# Altium PCB PCB2.PcbDoc
Units mil, origin at the board's own origin, x right, y up, seen from the top; angles counter-clockwise.
Board outline 2598.43 x 2874.02 mil, 2 copper layers (Top Layer, Bottom Layer); 202 components, 116 nets, 598 pads, 104 vias.
Unrouted connection lines stored in the file: 22.
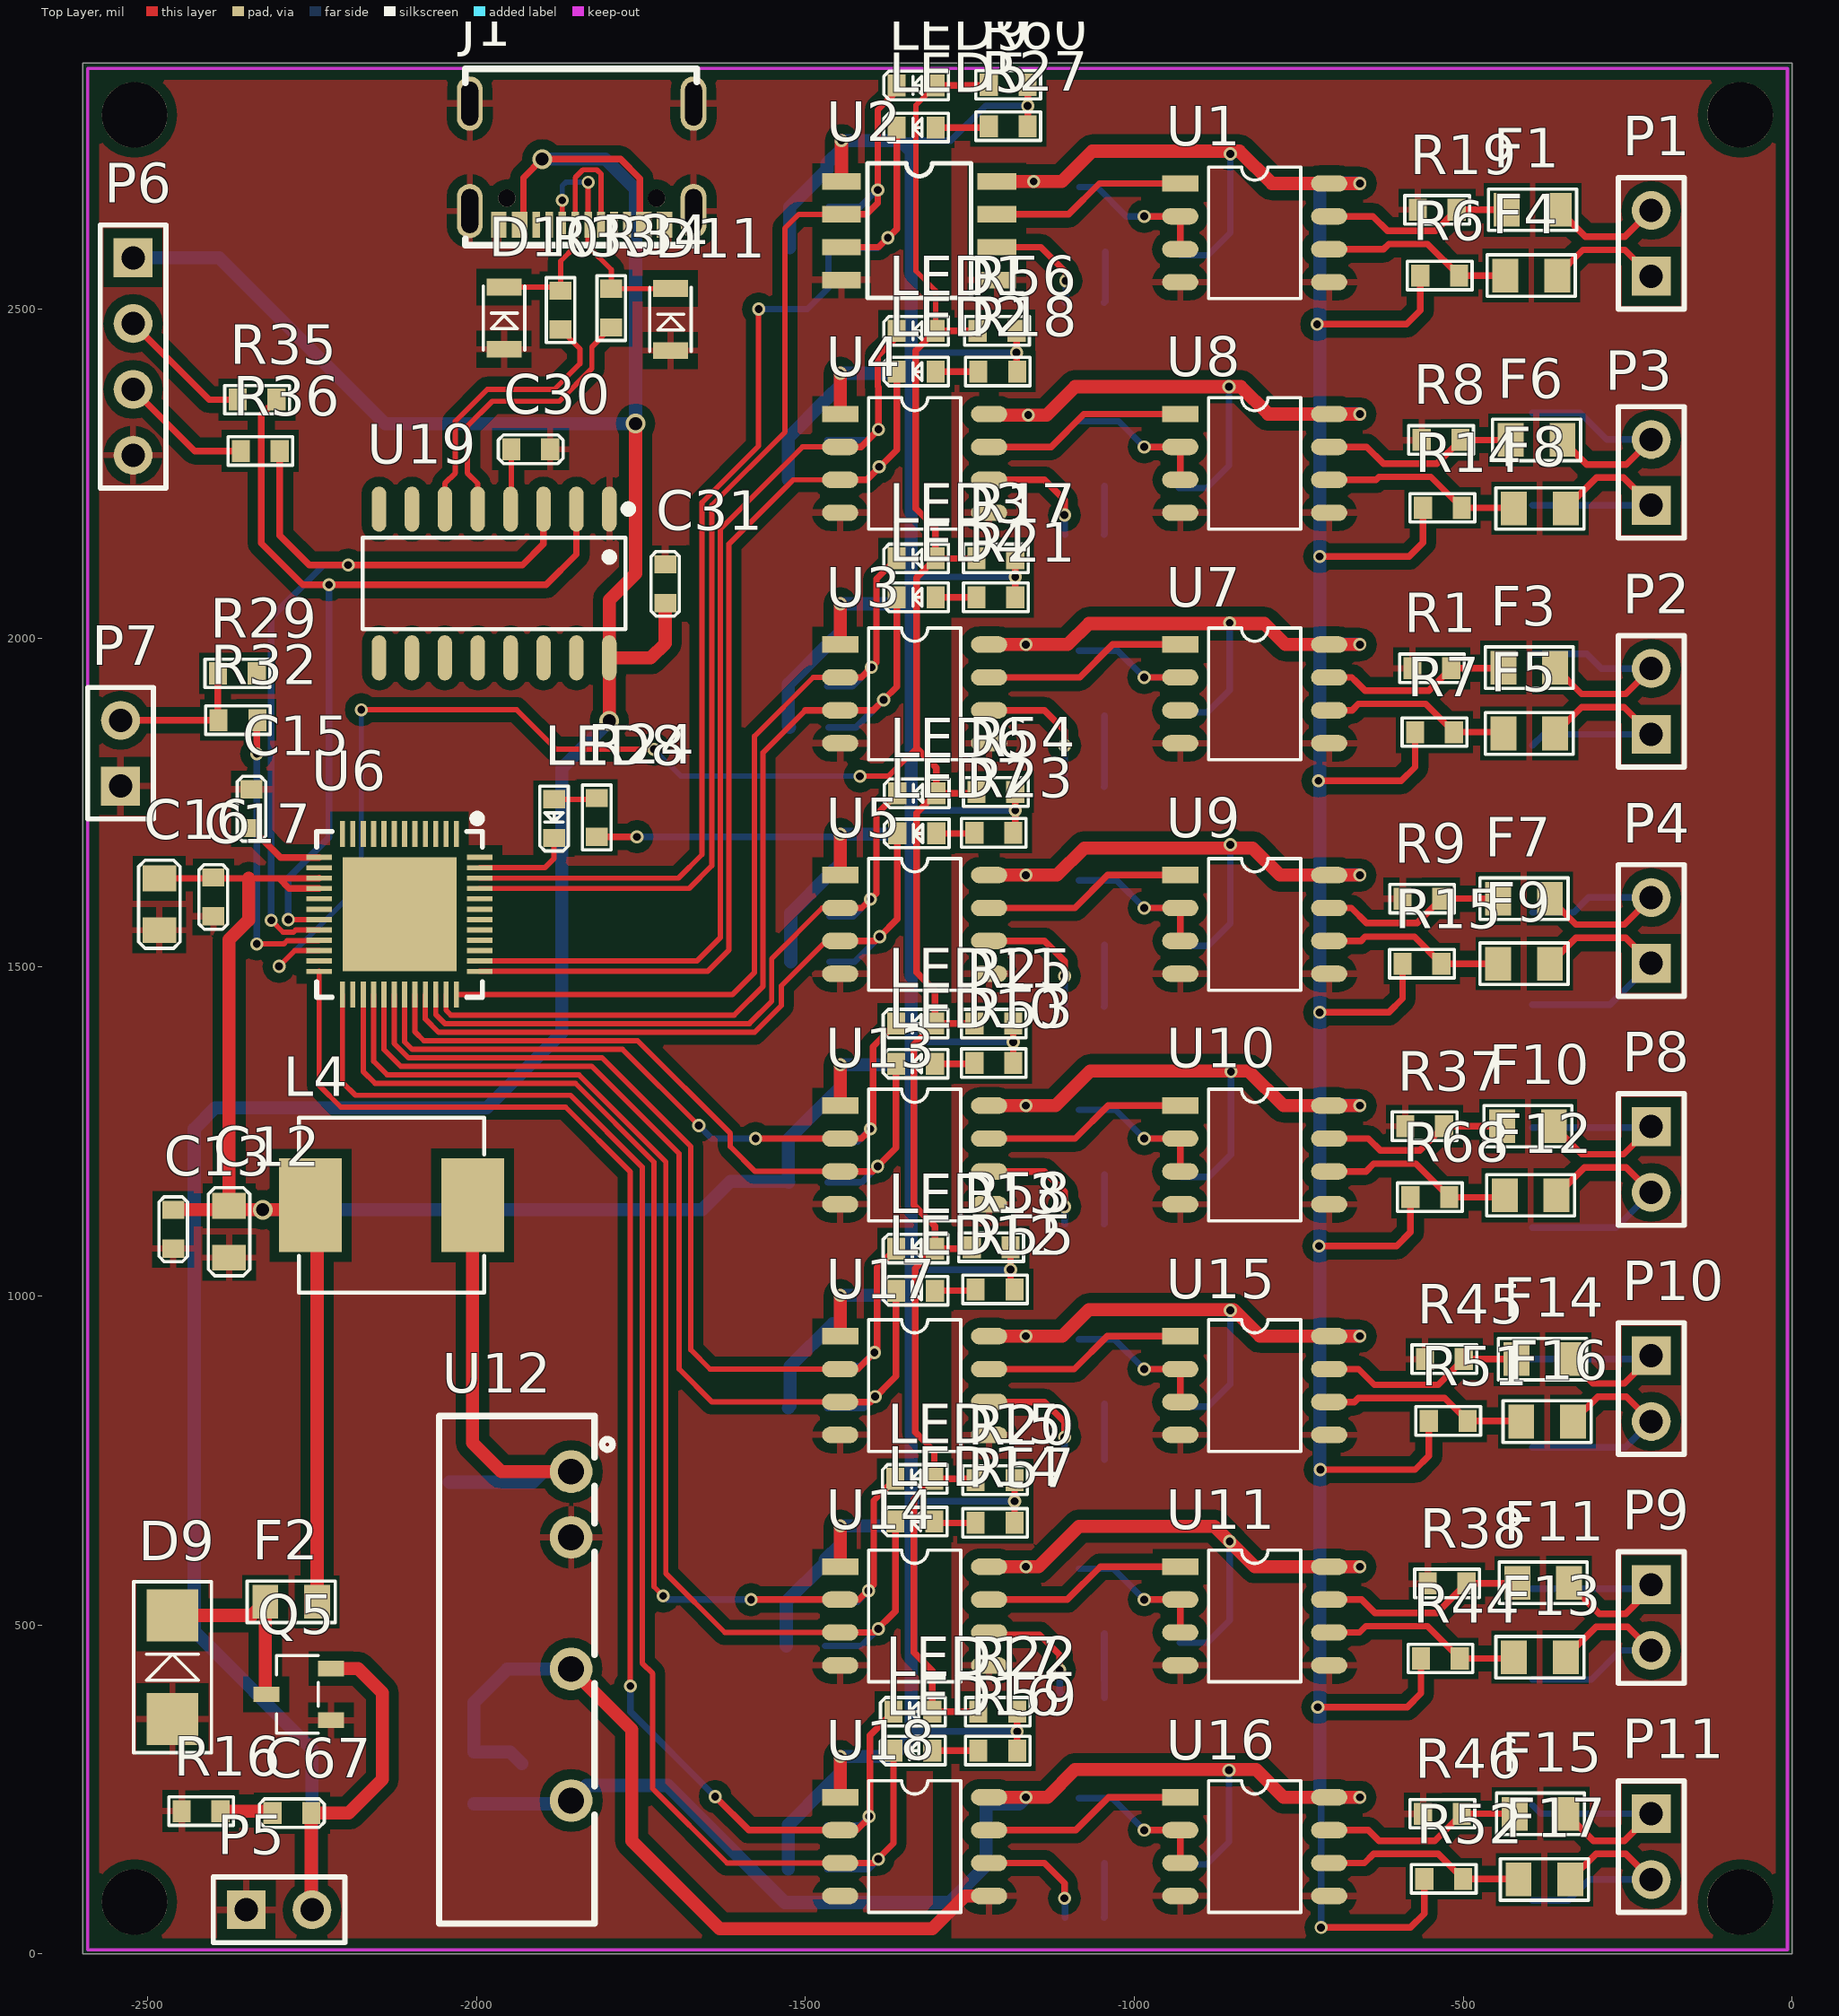
[diagram p0: Top Layer view]
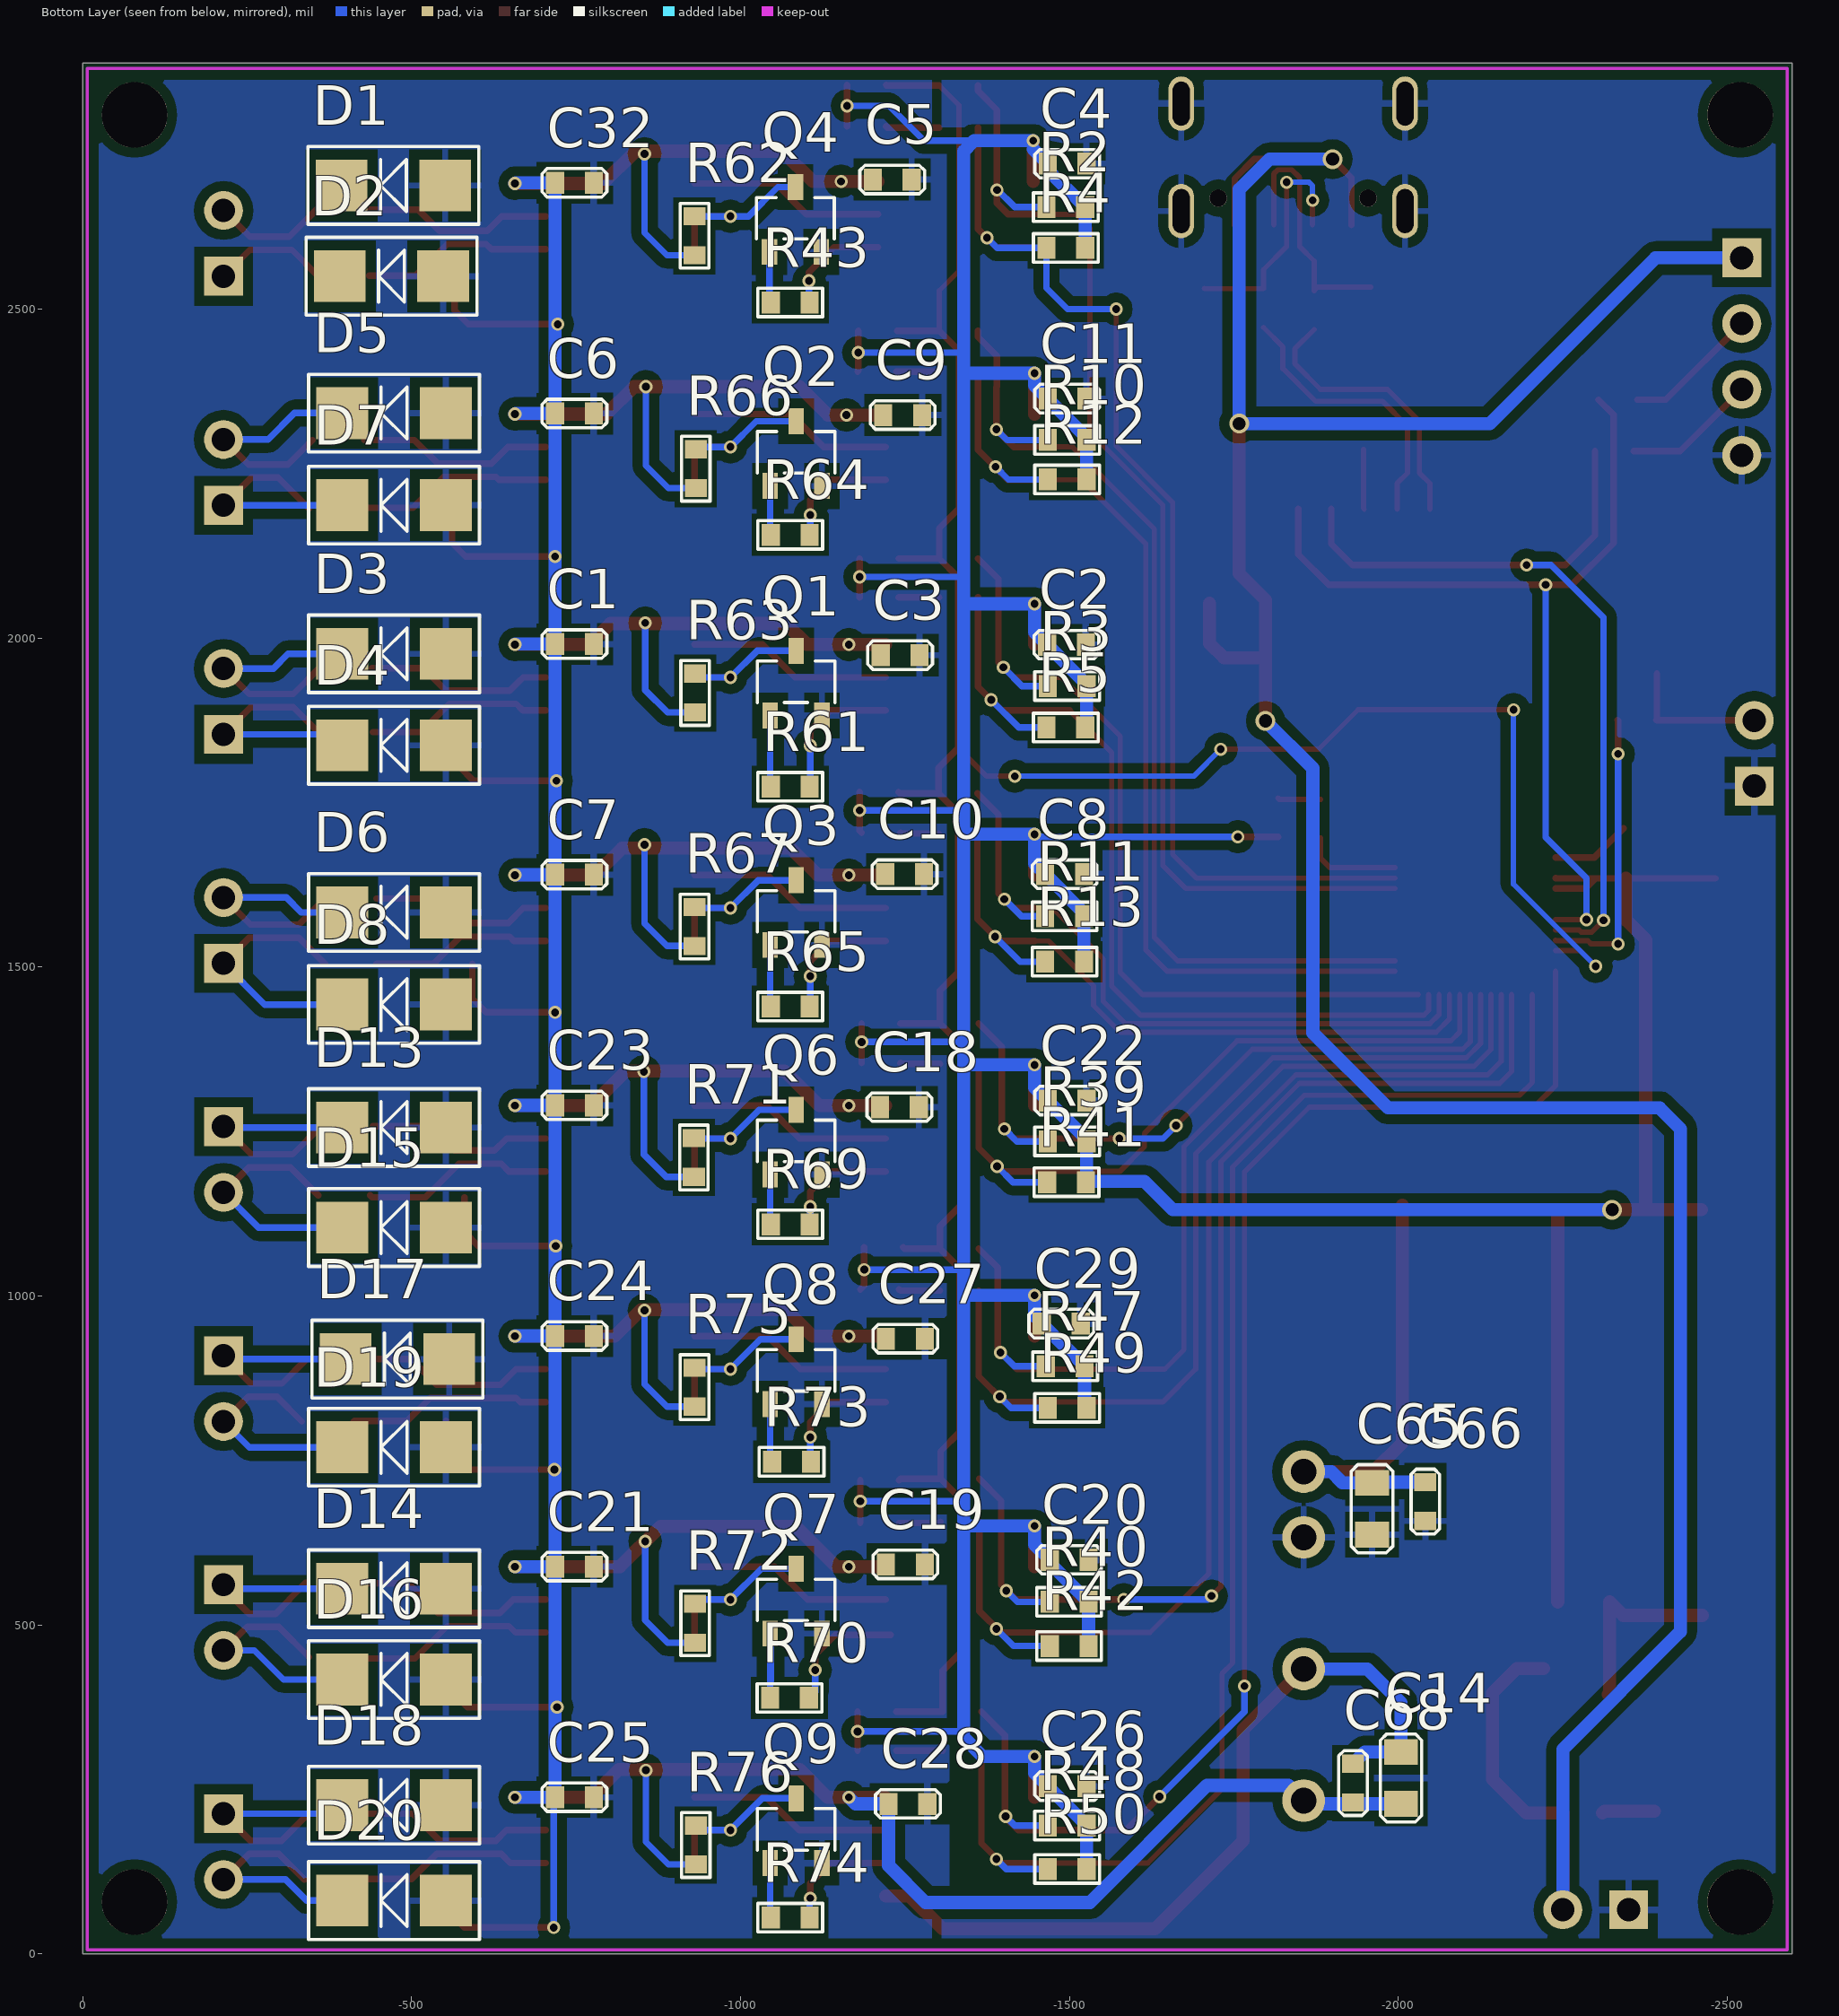
[diagram p1: Bottom Layer view, seen from below]

## Layer stack, top to bottom
Top Layer: signal copper 1.4
Dielectric: dielectric 12.6, FR-4, Dk 4.8
Bottom Layer: signal copper 1.4

## Board outline
-2598.43,0 0,0 0,2874.02 -2598.43,2874.02

## Design rules (kind name [scope] priority, off if disabled: settings)
Clearance Clearance_1 [InPolygon] p1: gap=15
Clearance [All] p2: gap=5
DiffPairsRouting [All] p1: maxlimit=10 minlimit=10 mostfreqgap=10 maxuncoupledlength=500
PolygonConnect [All] p1: connectstyle=Relief reliefconductorwidth=10 reliefentries=4 polygonreliefangle="90 Angle"
RoutingVias [All] p1: holewidth=28 width=50 viastyle="Through Hole" minholewidth=28 minwidth=50 maxholewidth=28 maxwidth=50
SilkscreenOverComponentPads [All] p1: minsilkscreentomaskgap=10
SolderMaskExpansion [All] p1: expansion=4
Width [All] p1: maxlimit=200 minlimit=5 preferedwidth=10
26 further rules are at their usual default settings.

## Classes and differential pairs
component class rs485: C1 C2 C3 C4 C5 C6 C7 C8 C9 C10 C11 C12 C13 C14 C18 C19 C20 C21 C22 C23 C24 C25 C26 C27 C28 C29 C30 C31 C32 C65 C66 C67 C68 C70 D1 D2 D3 D4 D5 D6 D7 D8 D9 D13 D14 D15 D16 D17 D18 D19 D20 F1 F2 F3 F4 F5 F6 F7 F8 F9 F10 F11 F12 F13 F14 F15 F16 F17 L4 P1 P2 P3 P4 P5 P8 P9 P10 P11 Q1 Q2 Q3 Q4 Q5 Q6 Q7 Q8 Q9 R1 R2 R3 R4 R5 R6 R7 R8 R9 R10 R11 R12 R13 R14 R15 R16 R19 R37 R38 R39 R40 R41 R42 R43 R44 R45 R46 R47 R48 R49 R50 R51 R52 R61 R62 R63 R64 R65 R66 R67 R68 R69 R70 R71 R72 R73 R74 R75 R76 U1 U2 U3 U4 U5 U7 U8 U9 U10 U11 U12 U13 U14 U15 U16 U17 U18 U19
component class Sheet2: C15 C16 C17 D10 D11 J1 LED1 LED2 LED3 LED4 LED5 LED6 LED7 LED8 LED9 LED10 LED11 LED12 LED13 LED14 LED15 LED16 LED17 P6 P7 R17 R18 R20 R21 R22 R23 R24 R25 R27 R29 R32 R33 R34 R35 R36 R53 R54 R55 R56 R57 R58 R59 R60 U6
differential pair 4858: +4858_P -4858_N
differential pair 4857: +4857_P -4857_N
differential pair 4856: +4856_P -4856_N
differential pair 4855: +4855_P -4855_N
differential pair 4854: +4854_P -4854_N
differential pair 4853: +4853_P -4853_N
differential pair 4852: +4852_P -4852_N
differential pair 4851: +4851_P -4851_N
differential pair USB: +USB_P -USB_N

## Components (designator, comment, footprint, x,y, rotation, side; value= is the part's Value field where it differs from the comment)
C1 "0.1uF/50V/X5R" 0603C -777,1990.86 r0 bottom
C2 "0.1uF/50V/X5R" 0603C -1525,1990 r0 bottom
C3 "0.1uF/50V/X5R" 0603C -1272,1974 r0 bottom
C4 "0.1uF/50V/X5R" 0603C -1526,2721 r0 bottom
C5 "0.1uF/50V/X5R" 0603C -1260,2697 r0 bottom
C6 "0.1uF/50V/X5R" 0603C -777,2341.43 r0 bottom
C7 "0.1uF/50V/X5R" 0603C -777,1640.29 r0 bottom
C8 "0.1uF/50V/X5R" 0603C -1522.06,1641 r0 bottom
C9 "0.1uF/50V/X5R" 0603C -1276,2339 r0 bottom
C10 "0.1uF/50V/X5R" 0603C -1279,1641 r0 bottom
C11 "0.1uF/50V/X5R" 0603C -1526,2364 r0 bottom
C12 "10uF/25V" 0805C -2376,1137 r270 top
C13 "0.1uF" 0603C -2461,1131 r270 top
C14 "10uF/25V" 0805C -2004,228 r90 bottom
C15 "0.1uF" 0603C -2342,1770 r270 top
C16 "22uF/16V/X5R" 0805C -2482,1556 r90 top
C17 "0.1uF/50V/X5R" 0603C -2400,1577 r90 top
C18 "0.1uF/50V/X5R" 0603C -1271,1287 r0 bottom
C19 "0.1uF/50V/X5R" 0603C -1280,592 r0 bottom
C20 "0.1uF/50V/X5R" 0603C -1529,599 r0 bottom
C21 "0.1uF/50V/X5R" 0603C -777,588.57 r0 bottom
C22 "0.1uF/50V/X5R" 0603C -1526,1297 r0 bottom
C23 "0.1uF/50V/X5R" 0603C -777,1289.71 r0 bottom
C24 "0.1uF/50V/X5R" 0603C -777,939.14 r0 bottom
C25 "0.1uF/50V/X5R" 0603C -777,238 r0 bottom
C26 "0.1uF/50V/X5R" 0603C -1526,255 r0 bottom
C27 "0.1uF/50V/X5R" 0603C -1280,935 r0 bottom
C28 "0.1uF/50V/X5R" 0603C -1284,228 r0 bottom
C29 "0.1uF/50V/X5R" 0603C -1517,958 r0 bottom
C30 "0.1uF/50V/X5R" 0603C -1947,2287 r0 top
C31 "0.1uF/50V/X5R" 0603C -1713,2112 r270 top
C32 "0.1uF/50V/X5R" 0603C -777,2692 r0 bottom
C65 "3.3uF" 0805C -1960,716 r270 bottom
C66 "0.1uF" 0603C -2041,717 r270 bottom
C67 "10uF" 0603C -2251,214 r180 top
C68 "0.1uF" 0603C -1931,230 r90 bottom
D1 "SMAJ6.5CA" SMA -551,2688 r0 bottom
D2 "SMAJ6.5CA" SMA -548,2550 r0 bottom
D3 "SMAJ6.5CA" SMA -552,1976 r0 bottom
D4 "SMAJ6.5CA" SMA -552,1837 r0 bottom
D5 "SMAJ6.5CA" SMA -552,2342 r0 bottom
D6 "SMAJ6.5CA" SMA -552,1583 r0 bottom
D7 "SMAJ6.5CA" SMA -552,2202 r0 bottom
D8 "SMAJ6.5CA" SMA -552,1443 r0 bottom
D9 "SMAJ5.0CA" SMA -2462,357 r90 top
D10 "CESDB5V0D3" SOD323 -1958,2439 r90 top
D11 "CESDB5V0D3" SOD323 -1705,2437 r90 top
D13 "SMAJ6.5CA" SMA -552,1256 r0 bottom
D14 "SMAJ6.5CA" SMA -552,555 r0 bottom
D15 "SMAJ6.5CA" SMA -552,1104 r0 bottom
D16 "SMAJ6.5CA" SMA -552,417 r0 bottom
D17 "SMAJ6.5CA" SMA -557,904 r0 bottom
D18 "SMAJ6.5CA" SMA -552,226 r0 bottom
D19 "SMAJ6.5CA" SMA -552,770 r0 bottom
D20 "SMAJ6.5CA" SMA -552,81 r0 bottom
F1 "100mA" 0805R -355,2651 r180 top
F2 "SMD0805P050" 0805R -2321,535 r0 top
F3 "100mA" 0805R -360,1955 r180 top
F4 "100mA" 0805R -357,2551 r180 top
F5 "100mA" 0805R -360,1855 r180 top
F6 "100mA" 0805R -349,2301 r180 top
F7 "100mA" 0805R -368,1604 r180 top
F8 "100mA" 0805R -344,2197 r180 top
F9 "100mA" 0805R -368,1505 r180 top
F10 "100mA" 0805R -362,1258 r180 top
F11 "100mA" 0805R -339,564 r180 top
F12 "100mA" 0805R -358,1153 r180 top
F13 "100mA" 0805R -344,451 r180 top
F14 "100mA" 0805R -340,904 r180 top
F15 "100mA" 0805R -343,213 r180 top
F16 "100mA" 0805R -333,809 r180 top
F17 "100mA" 0805R -337,113 r180 top
J1 "TYPE C_16P" TYPEC_16P -1840,2797 r180 top
L4 "47uH" IND-SMD_L7.0-W6.6_FXL0630 -2129,1138 r180 top
LED1 "LED" 0603LED -1302,2467 r180 top
LED2 "LED" 0603LED -1302,2405 r180 top
LED3 "LED" 0603LED -1302,2121 r180 top
LED4 "LED" 0603LED -1302,2062 r180 top
LED5 "LED" 0603LED -1302,2776 r180 top
LED6 "LED" 0603LED -1301,1764 r180 top
LED7 "LED" 0603LED -1301,1703 r180 top
LED8 "LED" 0603LED -1882,1755 r270 top
LED9 "LED" 0603LED -1302,2840 r180 top
LED10 "LED" 0603LED -1303,1353 r180 top
LED11 "LED" 0603LED -1303,1414 r180 top
LED12 "LED" 0603LED -1303,1008 r180 top
LED13 "LED" 0603LED -1303,1072 r180 top
LED14 "LED" 0603LED -1304,657 r180 top
LED15 "LED" 0603LED -1304,722 r180 top
LED16 "LED" 0603LED -1307,309 r180 top
LED17 "LED" 0603LED -1307,368 r180 top
P1 "Header 2" HDR1X2 -214,2550 r90 top
P2 "Header 2" HDR1X2 -214,1853.71 r90 top
P3 "Header 2" HDR1X2 -214,2201.86 r90 top
P4 "Header 2" HDR1X2 -214,1505.57 r90 top
P5 "Header 2" HDR1X2 -2350,67 r0 top
P6 "Header 4" HDR1X4 -2522,2578 r270 top
P7 "Header 2" HDR1X2 -2541,1775 r90 top
P8 "Header 2" HDR1X2 -214,1257.43 r270 top
P9 "Header 2" HDR1X2 -214,561.14 r270 top
P10 "Header 2" HDR1X2 -214,909.29 r270 top
P11 "Header 2" HDR1X2 -214,213 r270 top
Q1 "S8050" sot23-3 -1045,1882.29 r270 bottom
Q2 "S8050" sot23-3 -1045,2231.14 r270 bottom
Q3 "S8050" sot23-3 -1045,1533.43 r270 bottom
Q4 "S8050" sot23-3 -1044,2587 r270 bottom
Q5 "SI2301" sot23-3 -2221,355 r0 top
Q6 "S8050" sot23-3 -1045,1184.57 r270 bottom
Q7 "S8050" sot23-3 -1045,486.86 r270 bottom
Q8 "S8050" sot23-3 -1045,835.71 r270 bottom
Q9 "S8050" sot23-3 -1045,138 r270 bottom
R1 "10k" 0603r -577,1954 r0 top
R2 "10k" 0603r -1524,2655 r0 bottom
R3 "10k" 0603r -1526,1927 r0 bottom
R4 "10k" 0603r -1524,2593 r0 bottom
R5 "10k" 0603r -1524,1864 r0 bottom
R6 "10k" 0603r -506,2551 r180 top
R7 "10k" 0603r -514,1857 r180 top
R8 "10k" 0603r -563,2301 r0 top
R9 "10k" 0603r -592,1604 r0 top
R10 "10k" 0603r -1526,2301 r0 bottom
R11 "10k" 0603r -1522.06,1577 r0 bottom
R12 "10k" 0603r -1526,2241 r0 bottom
R13 "10k" 0603r -1522.06,1508 r0 bottom
R14 "10k" 0603r -502,2198 r180 top
R15 "10k" 0603r -533,1505 r180 top
R16 "10k" 0603r -2389,217 r180 top
R17 "2K" 0603R -1240,2121 r0 top
R18 "2K" 0603R -1237,2405 r0 top
R19 "10k" 0603r -569,2651 r0 top
R20 "2K" 0603R -1241,720 r0 top
R21 "2K" 0603R -1240,2062 r0 top
R22 "2K" 0603R -1237,368 r0 top
R23 "2K" 0603R -1243,1704 r0 top
R24 "2K" 0603R -1817,1757 r270 top
R25 "2K" 0603R -1243,1414 r0 top
R27 "2K" 0603R -1221,2778 r0 top
R29 "10k" 0603r -2334,1946.35 r180 top
R32 "10k" 0603r -2392,1875.35 r0 top
R33 "10k" 0603r -1872,2469 r90 top
R34 "10k" 0603r -1795,2472 r90 top
R35 "10k" 0603r -2304,2362.35 r180 top
R36 "10k" 0603r -2299,2284.35 r180 top
R37 "10k" 0603r -588,1258 r0 top
R38 "10k" 0603r -554,563 r0 top
R39 "10k" 0603r -1526,1235 r0 bottom
R40 "10k" 0603r -1529,535 r0 bottom
R41 "10k" 0603r -1525,1173 r0 bottom
R42 "10k" 0603r -1529,468 r0 bottom
R43 "10k" 0603r -1105,2510 r0 bottom
R44 "10k" 0603r -505,449 r180 top
R45 "10k" 0603r -558,904 r0 top
R46 "10k" 0603r -561,213 r0 top
R47 "10k" 0603r -1523,893 r0 bottom
R48 "10k" 0603r -1526,195 r0 bottom
R49 "10k" 0603r -1526,830 r0 bottom
R50 "10k" 0603r -1526,129 r0 bottom
R51 "10k" 0603r -493,810 r180 top
R52 "10k" 0603r -500,114 r180 top
R53 "2K" 0603R -1243,1354 r0 top
R54 "2K" 0603R -1240,1766 r0 top
R55 "2K" 0603R -1241,1010 r0 top
R56 "2K" 0603R -1238,2467 r0 top
R57 "2K" 0603R -1241,655 r0 top
R58 "2K" 0603R -1247,1074 r0 top
R59 "2K" 0603R -1237,309 r0 top
R60 "2K" 0603R -1221,2841 r0 top
R61 "10k" 0603r -1105,1774 r0 bottom
R62 "10k" 0603r -930,2641 r270 bottom
R63 "10k" 0603r -931,1946 r270 bottom
R64 "10k" 0603r -1105,2157 r0 bottom
R65 "10k" 0603r -1105,1440 r0 bottom
R66 "10k" 0603r -932,2287 r270 bottom
R67 "10k" 0603r -930,1591 r270 bottom
R68 "10k" 0603r -521,1150 r180 top
R69 "10k" 0603r -1105,1109 r0 bottom
R70 "10k" 0603r -1104,389 r0 bottom
R71 "10k" 0603r -929,1240 r270 bottom
R72 "10k" 0603r -931,532 r270 bottom
R73 "10k" 0603r -1107,748 r0 bottom
R74 "10k" 0603r -1105,55 r0 bottom
R75 "10k" 0603r -930,891 r270 bottom
R76 "10k" 0603r -932,195 r270 bottom
U1 "SP485R" so-8 -930,2691 r0 top
U2 "ADUM1201ARZ-RL7" SO8 -1445.7,2693.73 r0 top
U3 "ADUM1201ARZ-RL7" SO-8 -1447,1990.14 r0 top
U4 "ADUM1201ARZ-RL7" SO-8 -1447,2340.57 r0 top
U5 "ADUM1201ARZ-RL7" SO-8 -1447,1639.71 r0 top
U6 "STC8H8K64U-45I-QFN48" QFN-48_L6.0-W6.0-P0.40-TL-EP4.4 -2117,1580 r270 top
U7 "SP485R" so-8 -930,1990.14 r0 top
U8 "SP485R" so-8 -930,2340.57 r0 top
U9 "SP485R" so-8 -930,1639.71 r0 top
U10 "SP485R" so-8 -930,1289.29 r0 top
U11 "SP485R" so-8 -930,588.43 r0 top
U12 "B0505LS-1W" PWRM-TH_4P-L19.7-W6.0-P2.54 -1856,483 r270 top
U13 "ADUM1201ARZ-RL7" SO-8 -1447,1289.29 r0 top
U14 "ADUM1201ARZ-RL7" SO-8 -1447,588.43 r0 top
U15 "SP485R" so-8 -930,938.86 r0 top
U16 "SP485R" so-8 -930,238 r0 top
U17 "ADUM1201ARZ-RL7" SO-8 -1447,938.86 r0 top
U18 "ADUM1201ARZ-RL7" SO-8 -1447,238 r0 top
U19 "CH340C" SOP-16_L10.0-W3.9-P1.27-LS6.0-BL -1973,2083 r180 top

## Footprints (in the part's own frame and the unit in brackets; to place one, negate y for a bottom-side part, rotate by r counter-clockwise, add the part's x,y. Pads: shape width x height; smd on the part's side, far side on the other; paste and mask are expansions set on the pad)
0603C [mm]
  rect 0.7x0.85 smd: 1(0,0) 2(1.5,0)
  silkscreen extent -0.5,-0.55 2,0.55
0603LED [mm]
  rect 0.7x0.85 smd: 1(0,0) 2(1.5,0)
  silkscreen extent -0.5,-0.55 2,0.55
0603r [mm]
  rect 0.7x0.85 smd: 1(0,0) 2(1.5,0)
  silkscreen extent -0.5,-0.55 2,0.55
0603R [mm]
  rect 0.7x0.85 smd: 1(0,0) 2(1.5,0)
  silkscreen extent -0.5,-0.55 2,0.55
0805C [mm]
  rect 1x1.3 smd: 1(0,0) 2(2,0)
  silkscreen extent -0.7,-0.8 2.7,0.8
0805R [mm]
  rect 1x1.3 smd: 1(0,0) 2(2,0)
  silkscreen extent -0.7,-0.8 2.7,0.8
HDR1X2 [mm] "Connector; Header; 2 Position"
  rect 1.5x1.5 hole 0.9: 1(0,0)
  round 1.5 hole 0.9: 2(2.54,0)
  silkscreen extent -1.27,-1.27 3.81,1.27
HDR1X4 [mm] "Connector; Header; 4 Position"
  rect 1.5x1.5 hole 0.9: 1(0,0)
  round 1.5 hole 0.9: 2(2.54,0) 3(5.08,0) 4(7.62,0)
  silkscreen extent -1.27,-1.27 8.89,1.27
IND-SMD_L7.0-W6.6_FXL0630 [mm]
  rect 2.424x3.62 smd: 1(3.128,0) 2(-3.128,0)
  silkscreen extent -3.58,-3.38 3.58,3.38
PWRM-TH_4P-L19.7-W6.0-P2.54 [mm]
  round 1.65 hole 1 paste+0 mask+0.05: 1(-6.35,0) 2(-3.81,0) 4(1.27,0) 6(6.35,0)
  silkscreen extent -8.5,-5.1 11.1,1.6
QFN-48_L6.0-W6.0-P0.40-TL-EP4.4 [mm]
  rect 1x0.2 smd paste-100 mask+0.05: 1(-3.1,2.2) 2(-3.1,1.8) 3(-3.1,1.4) 4(-3.1,1) 5(-3.1,0.6) 6(-3.1,0.2) 7(-3.1,-0.2) 8(-3.1,-0.6) 9(-3.1,-1) 10(-3.1,-1.4) 11(-3.1,-1.8) 12(-3.1,-2.2) 25(3.1,-2.2) 26(3.1,-1.8) 27(3.1,-1.4) 28(3.1,-1) 29(3.1,-0.6) 30(3.1,-0.2) 31(3.1,0.2) 32(3.1,0.6) 33(3.1,1) 34(3.1,1.4) 35(3.1,1.8) 36(3.1,2.2)
  rect 0.2x1 smd paste-100 mask+0.05: 13(-2.2,-3.1) 14(-1.8,-3.1) 15(-1.4,-3.1) 16(-1,-3.1) 17(-0.6,-3.1) 18(-0.2,-3.1) 19(0.2,-3.1) 20(0.6,-3.1) 21(1,-3.1) 22(1.4,-3.1) 23(1.8,-3.1) 24(2.2,-3.1) 37(2.2,3.1) 38(1.8,3.1) 39(1.4,3.1) 40(1,3.1) 41(0.6,3.1) 42(0.2,3.1) 43(-0.2,3.1) 44(-0.6,3.1) 45(-1,3.1) 46(-1.4,3.1) 47(-1.8,3.1) 48(-2.2,3.1)
  rect 4.4x4.4 smd paste-100 mask+0.05: 49(0.001,0.001)
  silkscreen extent -3.85,-3.2 3.2,3.2
SMA [mm]
  rect 2x2 smd: 1(0,0) 2(4,0)
  silkscreen extent -1.3,-1.5 5.3,1.5
SO8 [mm]
  rect 1.5x0.635 smd: 1(0.018,0.011) 2(0.018,-1.259) 3(0.018,-2.529) 4(0.018,-3.799) 5(6.018,-3.799) 6(6.018,-2.529) 7(6.018,-1.259) 8(6.018,0.011)
  silkscreen extent 1.02,-4.49 5.02,0.71
so-8 [mil]
  rect 55x25 smd: 1(0,0)
  oval 55x25 smd: 2(0,-50) 3(0,-100) 4(0,-150) 5(226.38,-150) 6(226.38,-100) 7(226.38,-50) 8(226.38,0)
  silkscreen extent 43,-175 183,25
SO-8 [mil]
  rect 55x25 smd: 1(0,0)
  oval 55x25 smd: 2(0,-50) 3(0,-100) 4(0,-150) 5(226.38,-150) 6(226.38,-100) 7(226.38,-50) 8(226.38,0)
  silkscreen extent 43,-175 183,25
SOD323 [mm]
  rect 0.65x1.35 smd: 1(0,0) 2(2.4,0)
  silkscreen extent -0.03,-0.8 2.44,0.8
SOP-16_L10.0-W3.9-P1.27-LS6.0-BL [mm]
  oval 0.56x1.745 smd: 1(-4.445,-2.872) 2(-3.175,-2.872) 3(-1.905,-2.872) 4(-0.635,-2.872) 5(0.635,-2.872) 6(1.905,-2.872) 7(3.175,-2.872) 8(4.445,-2.872) 9(4.445,2.872) 10(3.175,2.872) 11(1.905,2.872) 12(0.635,2.872) 13(-0.635,2.872) 14(-1.905,2.872) 15(-3.175,2.872) 16(-4.445,2.872)
  silkscreen extent -5.33,-3.02 5.08,1.77
sot23-3 [mm]
  rect 1x0.6 smd: 1(0,0) 2(0,2) 3(-2.5,1)
  silkscreen extent -2.1,-0.5 -0.5,2.5
TYPEC_16P [mm]
  oval 1x2.1 hole 0.65 slot 1.7 at 90 deg: 1(-4.32,3.759) 1(-4.32,-0.391) 1(4.32,3.759) 1(4.32,-0.391)
  round 0.67 hole 0.67: 2(-2.89,3.259) 2(2.89,3.259)
  rect 0.3x1 smd: A1(-3.05,4.293) A4(-2.25,4.293) A5(-1.25,4.293) A6(-0.25,4.293) A7(0.25,4.293) A8(1.25,4.293) A9(2.25,4.293) A12(3.35,4.293) B1(3.05,4.293) B4(2.55,4.293) B5(1.75,4.293) B6(0.75,4.293) B7(-0.75,4.293) B8(-1.75,4.293) B9(-2.55,4.293) B12(-3.35,4.293)
  silkscreen extent -4.45,-1.73 4.49,5.07

## Part data
C1 C2 C3 C4 C5 C6 C7 C8 C9 C10 C11 C16 C17 C18 C19 C20 C21 C22 C23 C24 C25 C26 C27 C28 C29 C30 C31 C32: library part CAP4, "贴片电容 20%"
C12 C13 C14 C15 C65 C66 C67 C68: library part CAP, "Capacitor"
D1 D2 D3 D4 D5 D6 D7 D8 D9 D10 D11 D13 D14 D15 D16 D17 D18 D19 D20: library part "DIODE S", "Schottky Diode"
F1 F3 F4 F5 F6 F7 F8 F9 F10 F11 F12 F13 F14 F15 F16 F17: library part RES2
F2: library part "Fuse 2", "Fuse"
L4: library part INDUCTOR
P1 P2 P3 P4 P5 P7 P8 P9 P10 P11: "Header, 2-Pin"
P6: "Header, 4-Pin"
Q1 Q2 Q3 Q4 Q6 Q7 Q8 Q9: library part NPN, "NPN Bipolar Transistor"
Q5: library part MOSFET-P, "P-Channel MOSFET"
R1 R2 R3 R4 R5 R6 R7 R8 R9 R10 R11 R12 R13 R14 R15 R16 R19 R29 R32 R33 R34 R35 R36 R37 R38 R39 R40 R41 R42 R43 R44 R45 R46 R47 R48 R49 R50 R51 R52 R61 R62 R63 R64 R65 R66 R67 R68 R69 R70 R71 R72 R73 R74 R75 R76: library part Resistor_0603
R17 R18 R20 R21 R22 R23 R24 R25 R27 R53 R54 R55 R56 R57 R58 R59 R60: library part RES1
U1 U7 U8 U9 U10 U11 U15 U16: library part SN65HVD06D
U12: library part B0505S

## Free pads (board coordinates)
  round 99.61 hole 99.61 unplated: 0(-2519.68,78.74) 0(-2519.68,2795.28) 0(-78.74,78.74) 0(-78.74,2795.28)

## Via types
v1: diameter 20, hole 12, Top Layer to Bottom Layer, tented both sides, 100 vias
v2: diameter 30, hole 20, Top Layer to Bottom Layer, tented both sides, 4 vias

## Nets (pads, with @x,y where several pads share a name; then routed paths per layer and width w, separated by ;. In a path a pad name is that pad's centre, name@x,y a point inside that pad or via, vN(x,y) a via of type N, cw(c..) or ccw(c..) an arc to the next point about the centre after c; other vN are vias at no path point)
5V_OUT1: C2.2 C4.2 C8.2 C11.2 C12.1 C13.1 C16.2 C17.2 C20.2 C22.2 C26.2 C29.2 F2.2 L4.1 R2.1 R3.1 R4.1 R5.1 R10.1 R11.1 R12.1 R13.1 R17.2 R18.2 R20.2 R21.2 R22.2 R23.2 R24.2 R25.2 R27.2 R29.1 R39.1 R40.1 R41.1 R42.1 R47.1 R48.1 R49.1 R50.1 R53.2 R54.2 R55.2 R56.2 R57.2 R58.2 R59.2 R60.2 U2.1 U3.1 U4.1 U5.1 U6.15 U6.16 U13.1 U14.1 U17.1 U18.1 | length 10023.4
  Top Layer w10: C16.2 -2346,1634.74 -2300,1634.74 ; U6.16 -2284.63,1619.38 -2300,1634.74 ; U6.15 -2239.43,1634.74 -2300,1634.74 ; R24.2 v1(-1755.94,1697.94) ; R58.2 v1(-1187.94,1040) -1187.94,1016 R55.2 ; R53.2 v1(-1183.94,1386) R25.2 ; R23.2 -1180.94,1707 v1(-1180.94,1738) R54.2 ; R57.2 v1(-1181.94,688) R20.2 ; R21.2 v1(-1180.94,2093) R17.2 ; R56.2 v1(-1178.94,2434) -1178.94,2406 R18.2 ; R59.2 v1(-1177.94,338) R22.2 ; R27.2 v1(-1161.94,2809) R60.2
  Top Layer w20: C13.1 v2(-2325,1131) -2252.15,1131 -2245.15,1131 -2242.26,1128.11 F2.2 ; C12.1 -2376,1541.36 -2346,1571.36 -2346,1634.74 ; U18.1 v1(-1447,300) ; U14.1 v1(-1447,650.43) ; U17.1 v1(-1447,1000.86) ; U13.1 v1(-1447,1351.29) ; U5.1 v1(-1447,1701.71) ; U3.1 v1(-1447,2052.14) ; U4.1 v1(-1447,2402.57) ; U2.1 v1(-1444.97,2756.17)
  Bottom Layer w10: v1(-1755.94,1697.94) -1450.77,1697.94 v1(-1447,1701.71) ; -1355.17,2756.17 -1278.83,2756.17 -1226,2809 v1(-1161.94,2809) ; -1339,338 v1(-1177.94,338) ; -1339,1040 v1(-1187.94,1040) ; -1338,688 v1(-1181.94,688) ; -1338,1738 v1(-1180.94,1738) ; -1338,2434 v1(-1178.94,2434) ; -1337,2093 v1(-1180.94,2093) ; -1334,1386 v1(-1183.94,1386)
  Bottom Layer w20: v2(-2325,1131) -1657,1131 -1614,1174 R41.1@-1526,1174 ; R42.1 R40.1 -1469.94,594.06 C20.2 -1447,621.94 v1(-1447,650.43) -1340.57,650.43 ; R50.1 R48.1 ; R48.1@-1526,195.94 C26.2 -1447,274.94 v1(-1447,300) -1368,300 -1339,329 ; R49.1 -1523,833 R47.1 -1522.94,893 C29.2 ; R12.1 R10.1 ; R10.1@-1526,2304.94 C11.2 -1447,2383.94 v1(-1447,2402.57) -1343.57,2402.57 ; R41.1 R41.1@-1526,1174 ; R5.1 -1526,1866 R3.1 -1526,1929.94 C2.2 -1447,2008.94 v1(-1447,2052.14) -1339.86,2052.14 ; R4.1 R2.1 -1466.94,2712.06 C4.2 -1444.97,2742.97 ; R13.1 R11.1 ; R11.1@-1522.06,1581.94 C8.2 -1447,1657 v1(-1447,1701.71) -1339.29,1701.71 ; C29.2@-1447,968.94 v1@-1447,996 ; v1(-1447,1000.86) -1340.86,1000.86 ; v1(-1444.97,2756.17) -1355.17,2756.17 -1339,2740 -1339,1040 -1339,999 -1339,338 ; -1339.29,1351.29 v1(-1447,1351.29) -1447,1316.94 C22.2 -1526,1237.94 R39.1 R41.1@-1526,1174
4851_N: D1.2 F1.1 P1.2 | length 174.6
  Top Layer w10: F1.1 -314,2610 -254,2610 P1.2
4851_P: D2.2 F4.1 P1.1 | length 175.7
  Top Layer w10: F4.1 -318,2590 -254,2590 P1.1
4852_N: D5.2 F6.1 P3.2 | length 363.2
  Top Layer w10: F6.1 -312,2264 -281,2264 -251.86,2264 P3.2
  Bottom Layer w10: D5.2 -322,2342 -281.86,2301.86 P3.2
4852_P: D7.2 F8.1 P3.1 | length 347.5
  Top Layer w10: F8.1 -297,2244 -281,2244 -256.14,2244 P3.1
  Bottom Layer w10: D7.2 -394.38,2201.86 P3.1
4853_N: D3.2 F3.1 P2.2 | length 368.4
  Top Layer w10: F3.1 -320,1915 -290,1915 -252.71,1915 P2.2
  Bottom Layer w10: D3.2 -312,1976 -289.71,1953.71 P2.2
4853_P: D4.2 F5.1 P2.1 | length 367.1
  Top Layer w10: F5.1 -320,1895 -290,1895 -255.29,1895 P2.1
  Bottom Layer w10: D4.2 -377.81,1853.71 P2.1
4854_N: D6.2 F7.1 P4.2 | length 377.2
  Top Layer w10: F7.1 -328.5,1564.5 -283,1564.5 -255.07,1564.5 P4.2
  Bottom Layer w10: D6.2 -332,1583 -309.43,1605.57 P4.2
4854_P: D8.2 F9.1 P4.1 | length 392.9
  Top Layer w10: F9.1 -328.5,1544.5 -283,1544.5 -252.93,1544.5 P4.1
  Bottom Layer w10: D8.2 -276.57,1443 P4.1
4855_N: D13.2 F10.1 P8.1 | length 364.1
  Top Layer w10: F10.1 -319.5,1215.5 -288,1215.5 -255.93,1215.5 P8.1
  Bottom Layer w10: D13.2 -215.43,1256 P8.1
4855_P: D15.2 F12.1 P8.2 | length 380
  Top Layer w10: F12.1 -315.5,1195.5 -288,1195.5 -252.07,1195.5 P8.2
  Bottom Layer w10: D15.2 -267.43,1104 P8.2
4856_N: D17.2 F14.1 P10.1 | length 347.3
  Top Layer w10: F14.1 -303,867 -275,867 -255,867 -214,908 P10.1
  Bottom Layer w10: D17.2 -219.29,904 P10.1
4856_P: D19.2 F16.1 P10.2 | length 347.2
  Top Layer w10: F16.1 -295,847 -275,847 -251.71,847 P10.2
  Bottom Layer w10: D19.2 -253.29,770 P10.2
4857_N: D14.2 F11.1 P9.1 | length 349.4
  Top Layer w10: F11.1 -314,539 -314,538 -293,517 -273,517 -253,517 -214,556 P9.1
  Bottom Layer w10: D14.2 -220.14,555 P9.1
4857_P: D16.2 F13.1 P9.2 | length 362.7
  Top Layer w10: F13.1 -298,497 -273,497 -249.86,497 P9.2
  Bottom Layer w10: D16.2 -305,417 -260.86,461.14 P9.2
4858_N: D18.2 F15.1 P11.1 | length 348.9
  Top Layer w10: F15.1 -302,172 -280,172 -255,172 P11.1
  Bottom Layer w10: D18.2 -381.52,213 P11.1
4858_P: D20.2 F17.1 P11.2 | length 349.1
  Top Layer w10: F17.1 -298,152 -280,152 -253,152 P11.2
  Bottom Layer w10: D20.2 -340,81 -308,113 P11.2
AGND: C1.1 C3.1 C5.1 C6.1 C7.1 C9.1 C10.1 C14.2 C18.1 C19.1 C21.1 C23.1 C24.1 C25.1 C27.1 C28.1 C32.1 C68.2 D1.1 D2.1 D3.1 D4.1 D5.1 D6.1 D7.1 D8.1 D13.1 D14.1 D15.1 D16.1 D17.1 D18.1 D19.1 D20.1 Q1.2 Q2.2 Q3.2 Q4.2 Q6.2 Q7.2 Q8.2 Q9.2 R1.1 R8.1 R9.1 R19.1 R37.1 R38.1 R45.1 R46.1 U1.4 U1.5 U2.5 U3.5 U4.5 U5.5 U7.4 U7.5 U8.4 U8.5 U9.4 U9.5 U10.4 U10.5 U11.4 U11.5 U12.4 U13.5 U14.5 U15.4 U15.5 U16.4 U16.5 U17.5 U18.5 | length 1243.4
  Top Layer w20: U12.4 -1764,341 -1764,172 -1630,38 -1307,38 -1257,88 U18.5
  Bottom Layer w20: C68.2 -1948.69,306.74 C14.2 -2004,382 -1953,433 U12.4
BOOT: R32.2 U6.21 | length 438.1
  Top Layer w8: v1(-2334,1535) -2293,1535 -2288,1540 -2266,1540 -2239.69,1540 U6.21
  Top Layer w10: v1(-2334,1824) -2334,1874.29 R32.2
  Bottom Layer w10: v1(-2334,1535) v1(-2334,1824)
DEBUG: LED8.2 U6.47 | length 149.8
  Top Layer w8: U6.47 -1896.12,1650.88 -1882,1665 LED8.2
EARTH: 
GND: C2.1 C4.1 C8.1 C11.1 C12.2 C13.2 C15.1 C16.1 C17.1 C20.1 C22.1 C26.1 C29.1 C30.2 C31.1 C65.2 C66.2 D9.1 D10.1 D11.1 J1.1 J1.A1 J1.A12 J1.B1 J1.B12 P5.1 P6.4 P7.1 Q5.1 R16.2 U2.4 U3.4 U4.4 U5.4 U6.17 U6.49 U12.2 U13.4 U14.4 U17.4 U18.4 U19.1
INT: LED1.1 LED3.1 LED6.1 LED9.1 LED11.1 LED13.1 LED15.1 LED17.1 R17.1 R20.1 R22.1 R25.1 R54.1 R56.1 R58.1 R60.1 U6.22 | length 4581.7
  Top Layer w8: v1(-2300,1501) -2276.11,1524.89 U6.22 ; v1(-2175,1891) -1939,1891 -1879,1831 v1(-1730,1831) ; v1(-1417,1790) -1374,1790 -1331,1833 ; LED1.1 -1302,2528 -1332,2558 -1332,2810 LED9.1
  Top Layer w10: LED9.1 -1222,2840 R60.1 ; R58.1 -1249,1072 LED13.1 ; R25.1 LED11.1 ; R20.1 -1243,722 LED15.1 ; R54.1 -1242,1764 LED6.1 ; R17.1 LED3.1 ; R56.1 LED1.1 -1332,2437 -1332,2197 -1302,2167 LED3.1 ; R22.1 LED17.1 -1307,430 -1335,458 -1335,691 LED15.1 ; LED15.1 -1304,764 -1333,793 -1333,1042 LED13.1 ; LED13.1 -1303,1106 -1335,1138 -1335,1382 LED11.1 ; LED11.1 -1303,1464 -1331,1492 -1331,1734 LED6.1 ; LED3.1 -1331,2092 -1331,1833 -1301,1803 LED6.1
  Bottom Layer w8: v1(-2300,1501) -2175,1626 v1(-2175,1891) ; v1(-1730,1831) -1689,1790 v1(-1417,1790)
NetC15_2: C15.2 U6.13 | length 132.4
  Top Layer w10: C15.2 -2309.9,1678.84 ; -2302.06,1671 -2309.9,1678.84 ; U6.13 -2297.67,1666.61 -2309.9,1678.84
NetC30_1: C30.1 U19.4 | length 91.3
  Top Layer w8: U19.4 -1947,2197.09 C30.1
NetC65_1: C65.1 C66.1 L4.2 U12.1 | length 721.6
  Top Layer w20: L4.2 -2005.85,776.85 -1962,733 U12.1
  Bottom Layer w20: C66.1 -1961,717 C65.1 -1915,716 -1898,733 U12.1
NetC67_2: C67.2 R16.1 | length 80.2
  Top Layer w20: R16.1 -2313.06,217 C67.2
NetD9_2: D9.2 F2.1 Q5.3 | length 290.8
  Top Layer w20: D9.2 -2341.52,514.48 F2.1 -2321,395.94 Q5.3
NetD10_2: D10.2 J1.A7 J1.B7 R33.2 | length 393.8
  Top Layer w8: D10.2 -1877.43,2533.49 R33.2 -1872,2573 -1849.84,2595.16 J1.A7 -1849.84,2700.03 -1838.03,2711.84 -1816.84,2711.84 -1810.47,2705.47 J1.B7
NetD11_2: D11.2 J1.A6 J1.B6 R34.2 | length 367.6
  Top Layer w8: J1.B6 v1(-1869.53,2665.47) ; v1(-1830.16,2692.84) J1.A6 -1830.16,2595.16 -1795,2560 R34.2 -1705.43,2531.06 D11.2
  Bottom Layer w8: v1(-1869.53,2665.47) -1869.53,2687.47 -1864.16,2692.84 v1(-1830.16,2692.84)
NetF1_2: F1.2 R19.2 U1.7 | length 292.2
  Top Layer w10: U1.7 -637,2641 -615,2619 -541.94,2619 R19.2 F1.2
NetF3_2: F3.2 R1.2 U7.7 | length 286.3
  Top Layer w10: U7.7 -669.14,1940.14 -663.5,1934.5 -649,1920 -551.94,1920 R1.2 F3.2@-439.74,1954
NetF4_2: F4.2 R6.1 U1.6 | length 291.1
  Top Layer w10: U1.6 -621,2591 -613,2599 -554,2599 R6.1 F4.2
NetF5_2: F5.2 R7.1 U7.6 | length 284.8
  Top Layer w10: U7.6 -668.86,1890.14 -659,1900 -557,1900 R7.1 F5.2@-440.74,1857
NetF6_2: F6.2 R8.2 U8.7 | length 301.4
  Top Layer w10: U8.7 -646.57,2290.57 -621,2265 -539.94,2265 R8.2 F6.2
NetF7_2: F7.2 R9.2 U9.7 | length 281.6
  Top Layer w10: U9.7 -669.71,1589.71 -647,1567 -569.94,1567 R9.2 F7.2
NetF8_2: F8.2 R14.1 U8.6 | length 301.2
  Top Layer w10: U8.6 -632.43,2240.57 -628,2245 -549,2245 R14.1 F8.2@-423.74,2198
NetF9_2: F9.2 R15.1 U9.6 | length 276.5
  Top Layer w10: U9.6 -655.29,1539.71 -649,1546 -574,1546 R15.1 F9.2
NetF10_2: F10.2 R37.2 U10.7 | length 285.8
  Top Layer w10: U10.7 -644.29,1239.29 -626,1221 -565.94,1221 R37.2 F10.2
NetF11_2: F11.2 R38.2 U11.7 | length 313.4
  Top Layer w10: U11.7 -654.43,538.43 -634,518 -539.94,518 R38.2 -418.74,563 F11.2
NetF12_2: F12.2 R68.1 U10.6 | length 294.1
  Top Layer w10: U10.6 -647.71,1189.29 -636,1201 -572,1201 R68.1 -439.74,1150 F12.2
NetF13_2: F13.2 R44.1 U11.6 | length 306
  Top Layer w10: U11.6 -657.57,488.43 -648,498 -554,498 R44.1 -424.74,449 F13.2
NetF14_2: F14.2 R45.2 U15.7 | length 310.9
  Top Layer w10: U15.7 -658.86,888.86 -635,865 -537.94,865 R45.2 F14.2
NetF15_2: F15.2 R46.2 U16.7 | length 305.5
  Top Layer w10: U16.7 -644,188 -628,172 -542.94,172 R46.2 F15.2
NetF16_2: F16.2 R51.1 U15.6 | length 309.3
  Top Layer w10: U15.6 -665.14,838.86 -659,845 -528,845 R51.1 -412.74,810 F16.2
NetF17_2: F17.2 R52.1 U16.6 | length 309.8
  Top Layer w10: U16.6 -650,138 -636,152 -538,152 R52.1 -416.74,114 F17.2
NetLED2_1: LED2.1 R18.1 | length 65
  Top Layer w10: LED2.1 R18.1
NetLED4_1: LED4.1 R21.1 | length 62
  Top Layer w10: LED4.1 R21.1
NetLED5_1: LED5.1 R27.1 | length 81.8
  Top Layer w10: LED5.1 -1223,2776 R27.1
NetLED7_1: LED7.1 R23.1 | length 58.4
  Top Layer w10: LED7.1 -1244,1703 R23.1
NetLED8_1: LED8.1 R24.1 | length 65.8
  Top Layer w8: LED8.1 -1819,1755 R24.1
NetLED10_1: LED10.1 R53.1 | length 60.4
  Top Layer w10: LED10.1 -1244,1353 R53.1
NetLED12_1: LED12.1 R55.1 | length 62.8
  Top Layer w10: LED12.1 -1243,1008 R55.1
NetLED14_1: LED14.1 R57.1 | length 63.8
  Top Layer w10: LED14.1 -1302,655 R57.1
NetLED16_1: LED16.1 R59.1 | length 70
  Top Layer w10: LED16.1 R59.1
NetP6_2: P6.2 R35.2 | length 206.9
  Top Layer w10: P6.2 -2406.35,2362.35 R35.2
NetP6_3: P6.3 R36.2 | length 202.7
  Top Layer w10: P6.3 -2428.35,2284.35 R36.2
NetP7_2: P7.2 R29.2 R32.1 | length 220.8
  Top Layer w10: P7.2 R32.1@-2392.35,1875 ; R29.2 -2393.06,1875.71 R32.1@-2392.35,1875 ; R32.1 R32.1@-2392.35,1875
NetQ1_1: Q1.1 R61.2 | length 108.7
  Bottom Layer w10: R61.2 -1045,1774.94 Q1.1
NetQ1_3: Q1.3 R63.1 U7.2 U7.3 | length 227.3
  Top Layer w10: v1(-984.71,1940.14) U7.2
  Bottom Layer w10: Q1.3 -1025.28,1980.71 v1(-984.71,1940.14) -936.86,1940.14 R63.1
NetQ2_1: Q2.1 R64.2 | length 74.5
  Bottom Layer w10: R64.2 -1045,2157.94 Q2.1
NetQ2_3: Q2.3 R66.1 U8.2 U8.3 | length 274.7
  Top Layer w10: v1(-984.71,2290.57) U8.2 U8.3
  Bottom Layer w10: Q2.3 -1023.71,2329.57 v1(-984.71,2290.57) -935.57,2290.57 R66.1
NetQ3_1: Q3.1 R65.2 | length 93.8
  Bottom Layer w10: R65.2 -1045,1440.94 Q3.1
NetQ3_3: Q3.3 R67.1 U9.2 U9.3 | length 277.1
  Top Layer w10: v1(-984.71,1589.71) U9.2 U9.3
  Bottom Layer w10: Q3.3 -1026.85,1631.85 v1(-984.71,1589.71) -931.29,1589.71 R67.1
NetQ4_1: Q4.1 R43.2 | length 77.8
  Bottom Layer w10: R43.2 -1044,2511.94 Q4.1
NetQ4_3: Q4.3 R62.1 U1.2 U1.3 | length 276.5
  Top Layer w10: v1(-984.71,2641) U1.2 U1.3
  Bottom Layer w10: Q4.3 -1056.43,2685.43 -1012,2641 v1(-984.71,2641) R62.1
NetQ6_1: Q6.1 R69.2 | length 76
  Bottom Layer w10: R69.2 -1045,1109.94 Q6.1
NetQ6_3: Q6.3 R71.1 U10.2 U10.3 | length 278.5
  Top Layer w10: v1(-984.71,1239.29) U10.2 U10.3
  Bottom Layer w10: Q6.3 -1028.43,1283 v1(-984.71,1239.29) -929.71,1239.29 R71.1
NetQ7_1: Q7.1 R70.2 | length 170.1
  Bottom Layer w10: -1045.94,415 -1045.94,485.91 Q7.1 -1045,389.06 R70.2
NetQ7_3: Q7.3 R72.1 U11.2 U11.3 | length 280.2
  Top Layer w10: v1(-984.71,538.43) U11.2 U11.3
  Bottom Layer w10: Q7.3 -1031.57,585.28 v1(-984.71,538.43) -937.43,538.43 R72.1
NetQ8_1: Q8.1 R73.2 | length 84.8
  Bottom Layer w10: R73.2@-1045,750.94 Q8.1
NetQ8_3: Q8.3 R75.1 U15.2 U15.3 | length 278.7
  Top Layer w10: v1(-984.71,888.86) U15.2 U15.3
  Bottom Layer w10: Q8.3 -1030,934.14 v1(-984.71,888.86) -932.14,888.86 R75.1
NetQ9_1: Q9.1 R74.2 | length 83.4
  Bottom Layer w10: R74.2 -1045,55.94 Q9.1
NetQ9_3: Q9.3 R76.1 U16.2 U16.3 | length 280
  Top Layer w10: v1(-984.71,188) U16.2 U16.3
  Bottom Layer w10: Q9.3 -1033.14,236.43 v1(-984.71,188) -939,188 R76.1
NetR43_1: R43.1 U2.6 | length 167
  Top Layer w10: U2.6 -1142.17,2594.17 -1104,2556 v1(-1104,2543)
  Bottom Layer w10: R43.1 -1104,2511 v1(-1104,2543)
NetR61_1: R61.1 U3.6 | length 213.3
  Top Layer w10: U3.6 -1136.57,1890.14 -1106,1859.57 v1(-1106,1836.57)
  Bottom Layer w10: v1(-1106,1836.57) -1106,1775 R61.1
NetR64_1: R64.1 U4.6 | length 180.7
  Top Layer w10: U4.6 -1136.57,2240.57 -1106,2210 v1(-1106,2187)
  Bottom Layer w10: v1(-1106,2187) -1106,2158 R64.1
NetR65_1: R65.1 U5.6 | length 196.8
  Top Layer w10: U5.6 -1136.57,1539.71 -1106,1509.14 v1(-1106,1486.14)
  Bottom Layer w10: v1(-1106,1486.14) -1106,1441 R65.1
NetR69_1: R69.1 U13.6 | length 177.4
  Top Layer w10: U13.6 -1136.57,1189.29 -1106,1158.71 v1(-1106,1135.71)
  Bottom Layer w10: v1(-1106,1135.71) -1106,1110 R69.1
NetR70_1: R70.1 U14.6 | length 196.6
  Top Layer w10: U14.6@-1228,485 -1143.95,485 -1113.38,454.43 v1(-1113.38,431.43)
  Bottom Layer w10: v1(-1113.38,431.43) -1113.38,398.38 R70.1
NetR73_1: R73.1 U17.6 | length 188
  Top Layer w10: U17.6 -1136.57,838.86 -1106,808.29 v1(-1106,785.29)
  Bottom Layer w10: R73.1 -1106,749 v1(-1106,785.29)
NetR74_1: R74.1 U18.6 | length 180.1
  Top Layer w10: U18.6 -1136.57,138 -1106,107.43 v1(-1106,84.43)
  Bottom Layer w10: v1(-1106,84.43) -1105,83.43 R74.1
NetU1_1: U1.1 U2.7 | length 298.2
  Top Layer w10: U2.7 -1099.83,2644.17 -1053,2691 U1.1
NetU3_7: U3.7 U7.1 | length 311.3
  Top Layer w10: U3.7 -1082.86,1940.14 -1032.86,1990.14 U7.1
NetU4_7: U4.7 U8.1 | length 311.3
  Top Layer w10: U4.7 -1126.43,2290.57 -1076.43,2340.57 U8.1
NetU5_7: U5.7 U9.1 | length 311.3
  Top Layer w10: U5.7 -1090.29,1589.71 -1040.29,1639.71 U9.1
NetU10_1: U10.1 U13.7 | length 311.3
  Top Layer w10: U13.7 -1089.71,1239.29 -1039.71,1289.29 U10.1
NetU11_1: U11.1 U14.7 | length 311.3
  Top Layer w10: U14.7 -1101.57,538.43 -1051.57,588.43 U11.1
NetU15_1: U15.1 U17.7 | length 311.3
  Top Layer w10: U17.7 -1091.14,888.86 -1041.14,938.86 U15.1
NetU16_1: U16.1 U18.7 | length 311.3
  Top Layer w10: U18.7 -1089,188 -1039,238 U16.1
RXD0: R35.1 U6.19 U19.2 | length 1402.6
  Top Layer w8: v1@-2285.86,1572.14 U6.19
  Top Layer w10: R35.1 -2327,2339.35 -2327,2144 -2264,2081 v1(-2224,2081) -1894,2081 -1848,2127 U19.2
  Bottom Layer w10: v1(-2286,1572) -2286,1635 -2224,1697 v1(-2224,2081)
RXD1: LED9.2 R2.2 U2.2 U6.45 | length 1816.3
  Top Layer w8: U6.45 -1676.62,1619.38 -1642,1654 -1642,2202 -1531,2313 -1531,2623 -1509.83,2644.17 U2.2
  Top Layer w10: U2.2 -1406.83,2644.17 -1389.83,2661.17 v1(-1389.83,2681) -1389.83,2802.78 -1361.06,2831.56 LED9.2
  Bottom Layer w10: R2.2 -1416.83,2655 v1@-1389.83,2682
RXD2: LED1.2 R10.2 U4.2 U6.38 | length 1551.4
  Top Layer w8: U6.38 -1664.85,1509.14 -1629,1545 -1629,2166 -1504.43,2290.57 U4.2
  Top Layer w10: U4.2 -1415.43,2290.57 v1(-1388.89,2317.11) -1388.89,2381.11 -1389.83,2382.05 -1389.83,2428.89 -1361.06,2457.67 LED1.2
  Bottom Layer w10: R10.2 -1405,2301 v1(-1388.89,2317.11)
RXD3: LED3.2 R3.2 U3.2 U6.36 | length 1305.2
  Top Layer w8: U6.36 -1611.05,1457.95 -1577.18,1491.82 -1577.18,1850.97 -1488,1940.14 U3.2
  Top Layer w10: U3.2 -1414.86,1940.14 v1(-1399.56,1955.44) -1392,1963 -1392,2090.06 LED3.2
  Bottom Layer w10: R3.2 -1428,1927 v1@-1401.52,1953.48
RXD4: LED6.2 R11.2 U5.2 U6.34 | length 1063.8
  Top Layer w8: U6.34 -2061.89,1427.89 -2048,1414 -1585,1414 -1551.18,1447.82 -1551.18,1512.82 -1474.29,1589.71 U5.2
  Top Layer w10: U5.2 -1414.29,1589.71 v1(-1401,1603) -1392,1612 -1392,1732.06 LED6.2
  Bottom Layer w10: R11.2 -1427,1577 v1(-1401,1603)
RXD5: LED11.2 R39.2 U6.31 U13.2 | length 1116.6
  Top Layer w8: U6.31 -2109.12,1386.28 -2097.85,1375 -1778,1375 v1(-1662,1259)
  Top Layer w10: v1(-1575.71,1239.29) -1505,1239.29 ; -1524.29,1239.29 -1505,1239.29 ; LED11.2 -1397,1379.06 -1397,1257 -1414.71,1239.29 U13.2 -1505,1239.29
  Bottom Layer w10: v1(-1662,1259) -1642.29,1239.29 v1(-1575.71,1239.29) ; R39.2 -1420,1235 v1(-1401,1254)
RXD6: LED13.2 R47.2 U6.30 U17.2 | length 1449.8
  Top Layer w8: U6.30 -2124.88,1383.64 -2103.23,1362 -1809,1362 -1674,1227 -1674,918 -1644.86,888.86 U17.2
  Top Layer w10: U17.2 -1420.14,888.86 -1390.83,918.17 -1390.83,1043.22 LED13.2
  Bottom Layer w10: R47.2 -1416,893 v1(-1395,914)
RXD7: LED15.2 R40.2 U6.27 U14.2 | length 1852.6
  Top Layer w8: U6.27 -2172.11,1341.11 -2154,1323 -1849.54,1323 -1730,1203.46 -1730,558 v1(-1716,544)
  Top Layer w10: v1(-1582.43,538.43) U14.2 -1418.57,538.43 -1396,561 -1396,689.06 LED15.2
  Bottom Layer w10: v1@-1710.43,538.43 v1(-1582.43,538.43) ; R40.2 -1421,535 v1(-1404,552)
RXD8: LED17.2 R48.2 U6.24 U18.2 | length 2212.9
  Top Layer w8: U6.24 -2239.05,1320.05 -2206,1287 -1864.46,1287 -1766,1188.54 v1(-1766,407)
  Top Layer w10: v1(-1637,239) -1586,188 U18.2 -1422,188 -1402,208 -1402,332.06 LED17.2
  Bottom Layer w10: v1(-1766,407) -1766,368 v1(-1637,239) ; R48.2 -1417,195 v1(-1403,209)
TXD0: R36.1 U6.20 U19.3 | length 1306.1
  Top Layer w8: v1(-2311.87,1571) -2293.87,1553 -2278.13,1553 -2274.74,1556.39 -2259,1556.39 U6.20
  Top Layer w10: R36.1 -2299,2156 -2254,2111 v1(-2195,2111) -1930,2111 -1898,2143 U19.3
  Bottom Layer w10: v1(-2311.87,1571) -2311.87,2031.13 -2232,2111 v1(-2195,2111)
TXD1: LED5.2 R4.2 U2.3 U6.46 | length 1745.1
  Top Layer w8: U6.46 -1692.88,1635.12 -1657,1671 -1657,2206 -1571,2292 v1(-1571,2500)
  Top Layer w10: U2.3 -1388.83,2594.17 v1(-1374.51,2608.49) -1361.06,2621.94 LED5.2
  Bottom Layer w10: v1(-1571,2500) -1497,2500 -1464.94,2532.06 R4.2 -1390,2593 v1(-1374.51,2608.49) v1@-1373.77,2609.23
TXD2: LED2.2 R12.2 U4.3 U6.37 | length 1529.9
  Top Layer w8: U6.37 -1648.6,1493.39 -1616,1526 -1616,2143 -1518.43,2240.57 U4.3
  Top Layer w10: U4.3 -1406.43,2240.57 -1361.06,2285.94 LED2.2
  Bottom Layer w10: R12.2 -1407,2241 v1(-1387.71,2260.29)
TXD3: LED4.2 R5.2 U3.3 U6.35 | length 1364
  Top Layer w8: U6.35 -2046.14,1434.14 -2039,1427 -1608,1427 -1564.18,1470.82 -1564.18,1825.97 -1500,1890.14
  Top Layer w10: -1500,1890.14 U3.3 -1396.86,1890.14 v1(-1380.94,1906.06) -1361.06,1925.94 LED4.2
  Bottom Layer w10: R5.2 -1423,1864 v1@-1381,1906
TXD4: LED7.2 R13.2 U5.3 U6.33 | length 1073.4
  Top Layer w8: U6.33 -2077.62,1421 -2057.62,1401 -1577,1401 -1536.5,1441.5 -1536.5,1471.5 -1468.29,1539.71 U5.3
  Top Layer w10: U5.3 -1393.29,1539.71 v1(-1387,1546) -1360.06,1572.94 LED7.2
  Bottom Layer w10: R13.2 -1425,1508 v1(-1387,1546)
TXD5: LED10.2 R41.2 U6.32 U13.3 | length 1116.2
  Top Layer w8: U6.32 -2093.38,1401.38 -2080,1388 -1755,1388 -1614,1247 -1614,1227 -1576.29,1189.29 U13.3
  Top Layer w10: U13.3 -1397.71,1189.29 v1(-1390,1197) -1362.06,1224.94 LED10.2
  Bottom Layer w10: R41.2 -1414,1173 v1(-1390,1197)
TXD6: LED12.2 R49.2 U6.29 U17.3 | length 1501.8
  Top Layer w8: U6.29 -2140.62,1374.62 -2115,1349 -1824.63,1349 -1692,1216.37 -1692,889 -1641.86,838.86 U17.3
  Top Layer w10: U17.3 -1401.14,838.86 -1362.06,877.94 LED12.2
  Bottom Layer w10: R49.2 -1411,830 v1(-1394,847)
TXD7: LED14.2 R42.2 U6.28 U14.3 | length 1862
  Top Layer w8: U6.28 -2156.36,1356.75 -2135.62,1336 -1844.16,1336 -1712,1203.84 -1712,578 -1622.43,488.43 U14.3
  Top Layer w10: U14.3 -1395.57,488.43 -1363.06,520.94 LED14.2
  Bottom Layer w10: R42.2 -1415,468 v1(-1389,494)
TXD8: LED16.2 R50.2 U6.25 U18.3 | length 2244.2
  Top Layer w8: U6.25 -2203.61,1324.61 -2184,1305 -1857,1305 -1748,1196 -1748,442 -1732,426 -1732,251 -1619,138 U18.3
  Top Layer w10: U18.3 -1396,138 -1366.06,167.94 LED16.2
  Bottom Layer w10: R50.2 -1404,129 v1(-1389,144)
TXD_ISO: U6.39
TXD_ISO2: U6.40
TXD_ISO3: U6.42
TXD_ISO4: U6.43
USB_N: R33.1 U19.6 | length 437
  Top Layer w8: U19.6 -2048,2235 -2032,2251 -2032,2282 ; -2032,2289 -2032,2282 ; R33.1 -1842.5,2439.5 -1842.5,2417 -1881.5,2378 -1983.46,2378 -2032,2329.46 -2032,2282
USB_P: R34.1 U19.5 | length 433
  Top Layer w8: U19.5 -1998,2235 -2014,2251 -2014,2322 -1976,2360 -1874.04,2360 -1824.5,2409.54 -1824.5,2442.5 R34.1
VCC_5V_485: C1.2 C3.2 C5.2 C6.2 C7.2 C9.2 C10.2 C14.1 C18.2 C19.2 C21.2 C23.2 C24.2 C25.2 C27.2 C28.2 C32.2 C68.1 R6.2 R7.2 R14.2 R15.2 R44.2 R51.2 R52.2 R62.2 R63.2 R66.2 R67.2 R68.2 R71.2 R72.2 R75.2 R76.2 U1.8 U2.8 U3.8 U4.8 U5.8 U7.8 U8.8 U9.8 U10.8 U11.8 U12.6 U13.8 U14.8 U15.8 U16.8 U17.8 U18.8 | length 12324.8
  Top Layer w10: v1(-722,2477) -586,2477 -565.06,2497.94 R6.2 ; v1(-721,375) -585,375 -564.06,395.94 R44.2 ; v1(-720,1783) -594,1783 -573.06,1803.94 R7.2 ; v1(-719,1076) -601,1076 -580.06,1096.94 R68.2 ; v1(-718,1431) -613,1431 -592.06,1451.94 R15.2 ; v1(-718,2124) -582,2124 -561.06,2144.94 R14.2 ; v1(-717,736) -573,736 -552.06,756.94 R51.2 ; v1(-716,40) -580,40 -559.06,60.94 R52.2
  Top Layer w20: U18.8 v1(-1164.7,238) -1132,238 -1090,280 -815,280 -773,238 U16.8 v1(-657,238) ; U14.8 v1(-1164.7,588.43) -1145.57,588.43 -1084,650 -878,650 -816.43,588.43 U11.8 v1(-657,588.43) ; U17.8 v1(-1164.7,938.86) -1109.14,938.86 -1069,979 -849,979 -808.86,938.86 U15.8 v1(-657,938.86) ; U13.8 v1(-1164.7,1289.29) -1119.71,1289.29 -1067,1342 -826,1342 -773.29,1289.29 U10.8 v1(-657,1289.29) ; U5.8 v1(-1164.7,1639.71) -1117.29,1639.71 -1076,1681 -820,1681 -778.71,1639.71 U9.8 v1(-657,1639.71) ; U3.8 v1(-1164.7,1990.14) -1100.86,1990.14 -1069,2022 -802,2022 -770.14,1990.14 U7.8 v1(-657,1990.14) ; U4.8@-1216.94,2339 v1(-1161.03,2339) -1133,2339 -1090,2382 -838,2382 -796.57,2340.57 U8.8 v1(-657,2340.57) ; U2.8 v1(-1152.83,2694.17) -1109.83,2694.17 -1064,2740 -840,2740 -791,2691 U1.8 v1(-657,2691)
  Bottom Layer w10: R76.2 -890.06,135.94 -856,170 v1(-856,279) ; R66.2 -890.06,2227.94 -856,2262 v1(-856,2382) ; R72.2 -889.06,472.94 -855,507 v1(-855,627) ; R63.2 -889.06,1886.94 -855,1921 v1(-855,2023) ; R75.2 -888.06,831.94 -854,866 v1(-854,978) ; R67.2 -888.06,1531.94 -854,1566 v1(-854,1686) ; R62.2 -888.06,2581.94 -854,2616 v1(-854,2736) ; R71.2 -887.06,1180.94 -853,1215 v1(-853,1341) ; C25.2 -716,236.06 v1(-716,40)
  Bottom Layer w20: C14.1 -1860.99,228 U12.6 -1832.99,256 -1709,256 -1531,78 -1281,78 -1224.94,134.06 C28.2 -1174.7,228 v1(-1164.7,238) ; v1@-657.72,1990.86 C1.2 ; v1@-657.57,1640.29 C7.2 ; v1@-657.43,1289.71 C23.2 ; v1(-657,238) C25.2 C21.2 ; v1(-657,588.43) -657.14,588.57 C21.2 ; v1(-657,938.86) -657.29,939.14 C24.2 ; v1(-657,2340.57) -657.86,2341.43 C6.2 ; v1(-657,2691) -658,2692 C32.2 C6.2 ; C21.2 C24.2 ; C24.2 C23.2 ; C23.2 C7.2 ; C7.2 C1.2 ; C1.2 C6.2
VIN: C31.2 C67.1 J1.A4 J1.A9 J1.B4 J1.B9 P5.2 P6.1 Q5.2 U19.16 | length 5238.4
  Top Layer w10: J1.A9 -1928.58,2699.42 v2(-1900,2728) -1781,2728 -1751.42,2698.42 J1.A4
  Top Layer w20: P5.2 -2251,68 C67.1 -2194,214 -2143,265 -2143,397 -2179.74,433.74 Q5.2 ; v2(-1798,1874) U19.16 ; v2(-1758,2326) -1758,2098 -1798,2058 U19.16 ; C31.2 -1713,1992 -1735.09,1969.91 U19.16
  Bottom Layer w20: P6.1 -2391,2578 -2139,2326 v2(-1758,2326) -1758,2682 -1804,2728 v2(-1900,2728) ; P5.2 -2250,311 -2429,490 -2429,1254 -2397,1286 -1984,1286 -1870,1400 -1870,1802 v2(-1798,1874)
pads on no net: J1.2 J1.A5 J1.A8 J1.B5 J1.B8 U6.1 U6.2 U6.3 U6.4 U6.5 U6.6 U6.7 U6.8 U6.9 U6.10 U6.11 U6.12 U6.14 U6.18 U6.23 U6.26 U6.41 U6.44 U6.48 U19.7 U19.8 U19.9 U19.10 U19.11 U19.12 U19.13 U19.14 U19.15

## Polygon pours and split planes (outlines as drawn)
AGND on Top Layer "Top Layer-No Net" (solid, remove dead copper): 363,700 12,1051 12,3389 -863,3389 -1299,2953 -1278,2932 -1278,2497 -1278,-53 -1209,-122 -1084,-247 133,-247 133,551 329,747 331,749 331,753
GND on Top Layer "Top Layer-No Net" (solid, remove dead copper): -2807,3086 -2715,2994 -1306,2994 -1306,-113 -1298,-121 -1330,-89 -2816,-89 -2816,2900 -2718,2998
AGND on Bottom Layer "Top Layer-No Net" (solid, remove dead copper): 363,700 3.55,1051 3.55,3389 -892.51,3389 -1339,2953 -1317.49,2932 -1317.49,2497 -1317.49,-53 -1246.83,-122 -1118.83,-247 127.46,-247 127.46,551 328.18,747 330.23,749 330.23,753
GND on Bottom Layer "Top Layer-No Net" (solid, remove dead copper): -2807,3086 -2715,2994 -1306,2994 -1306,-113 -1298,-121 -1330,-89 -2816,-89 -2816,2900 -2718,2998

## Keep-outs
Keep-Out Layer:
  lines w5: -2591,6 -2591,2866 -7,2866 -7,6 -2591,6

## Silkscreen, mask and mechanical layers (free items; w line width, h text height)
Mechanical 1:
  the board outline again, w5